# Altium PCB SiLPA_HE.PcbDoc (part 1 of 10)
Units mm, origin at the board's own origin, x right, y up, seen from the top; angles counter-clockwise.
Board outline 222.47 x 100.01 mm, 4 copper layers (Top Layer, Int1 (GND), Int2 (PWR), Bottom Layer), stack 1.508 mm thick; 661 components, 355 nets, 1925 pads, 1744 vias.
Unrouted connection lines stored in the file: 360.
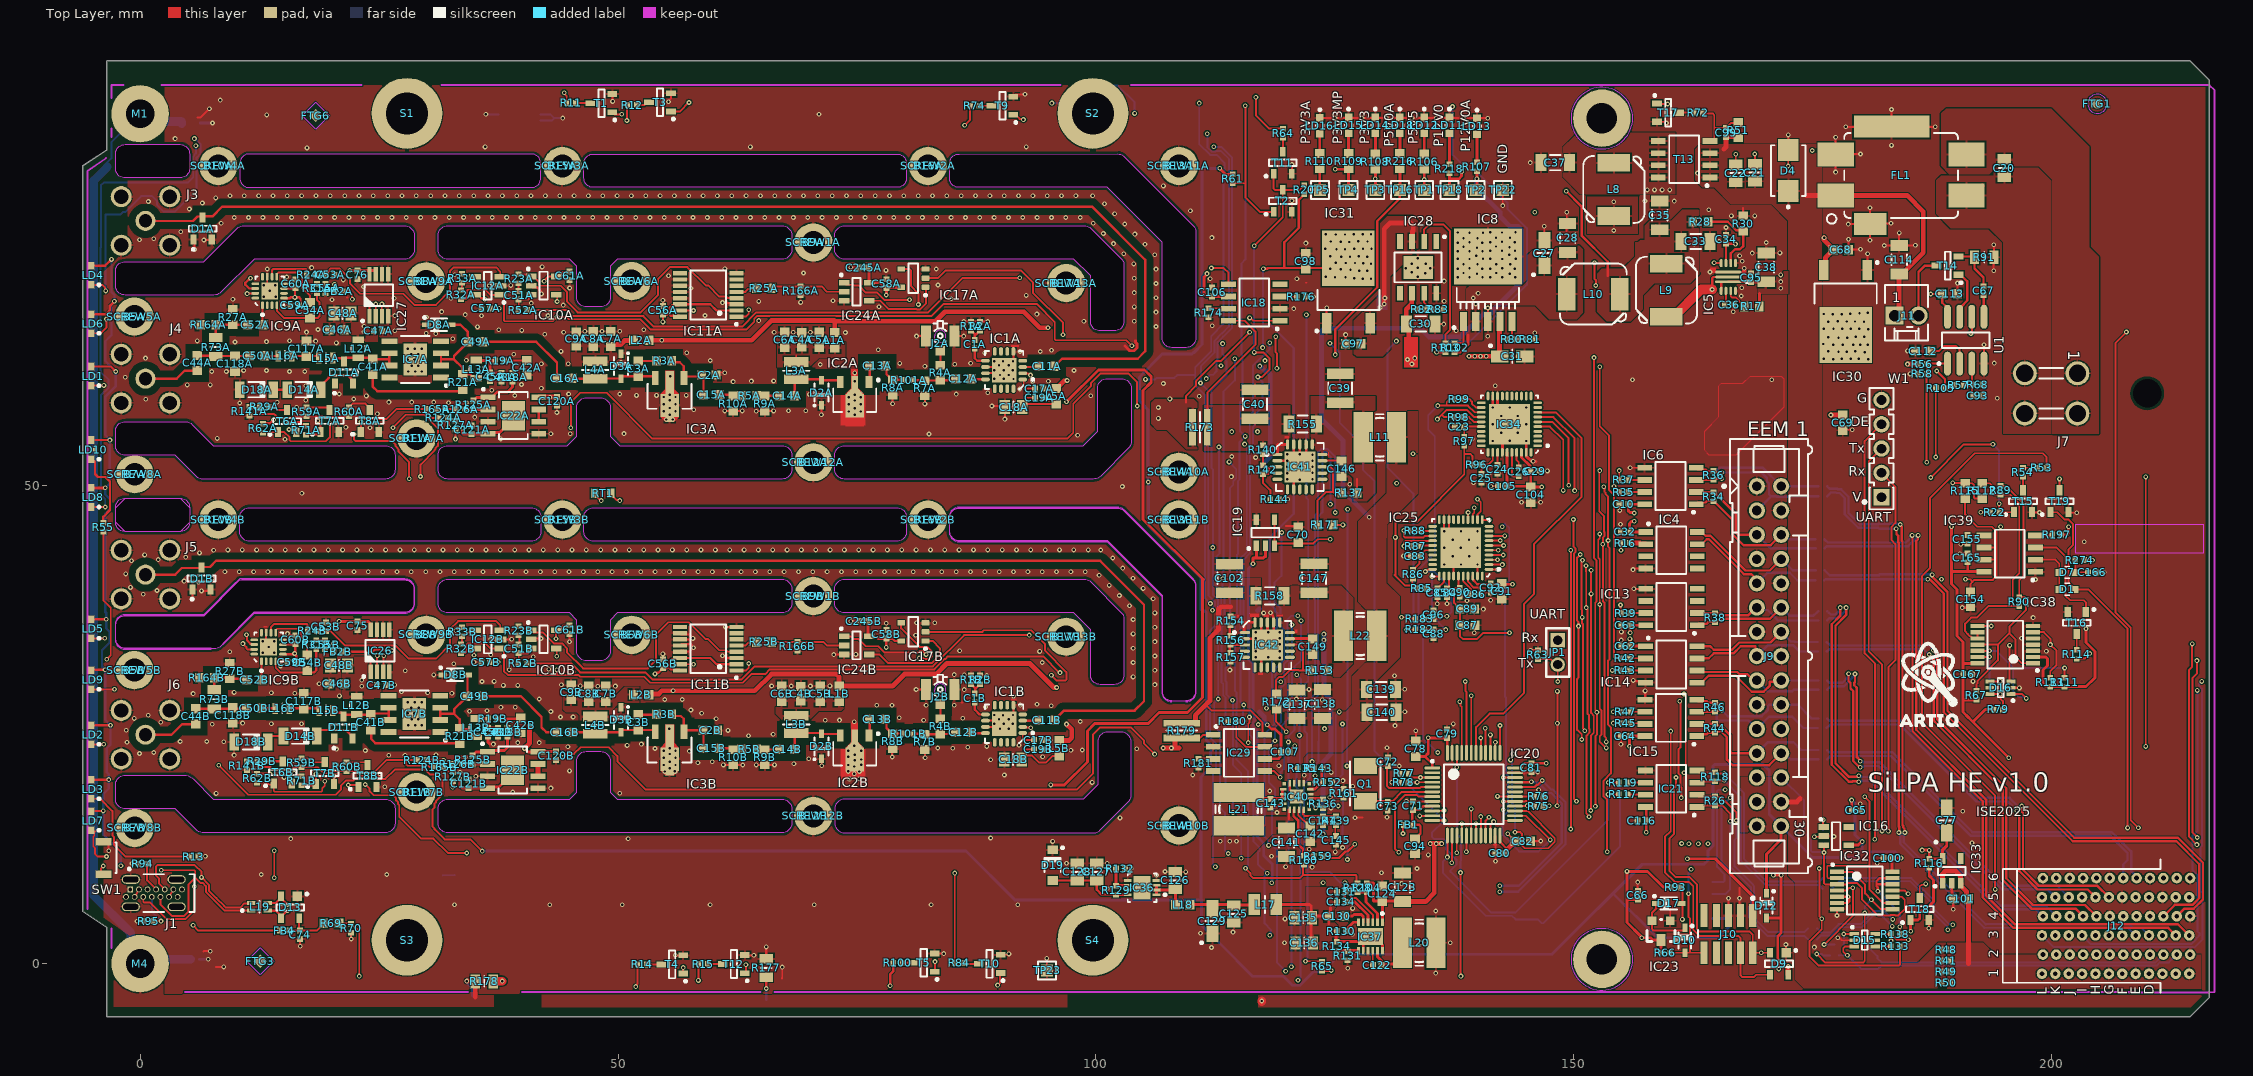
[diagram p0: Top Layer view]
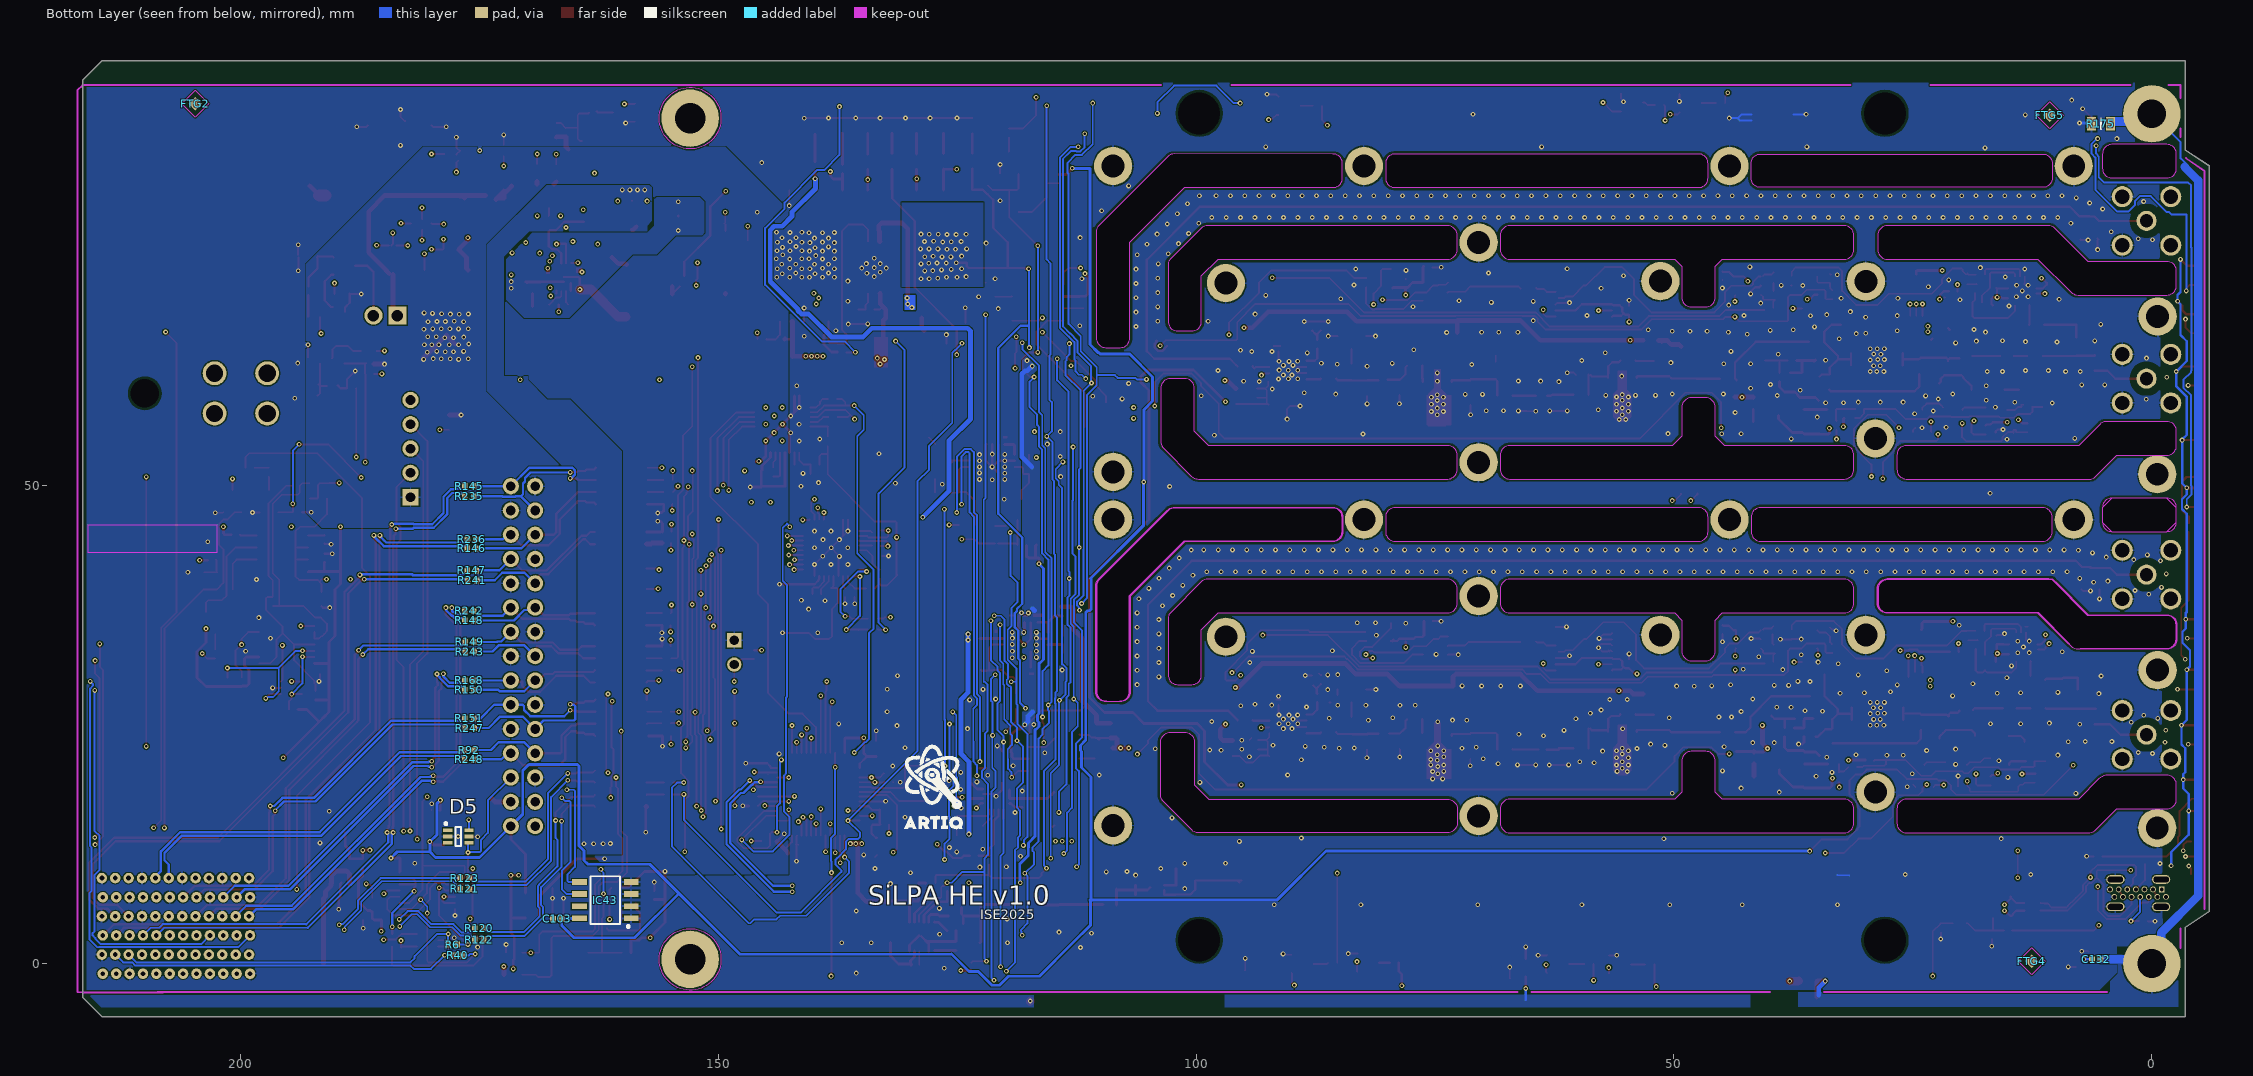
[diagram p1: Bottom Layer view, seen from below]
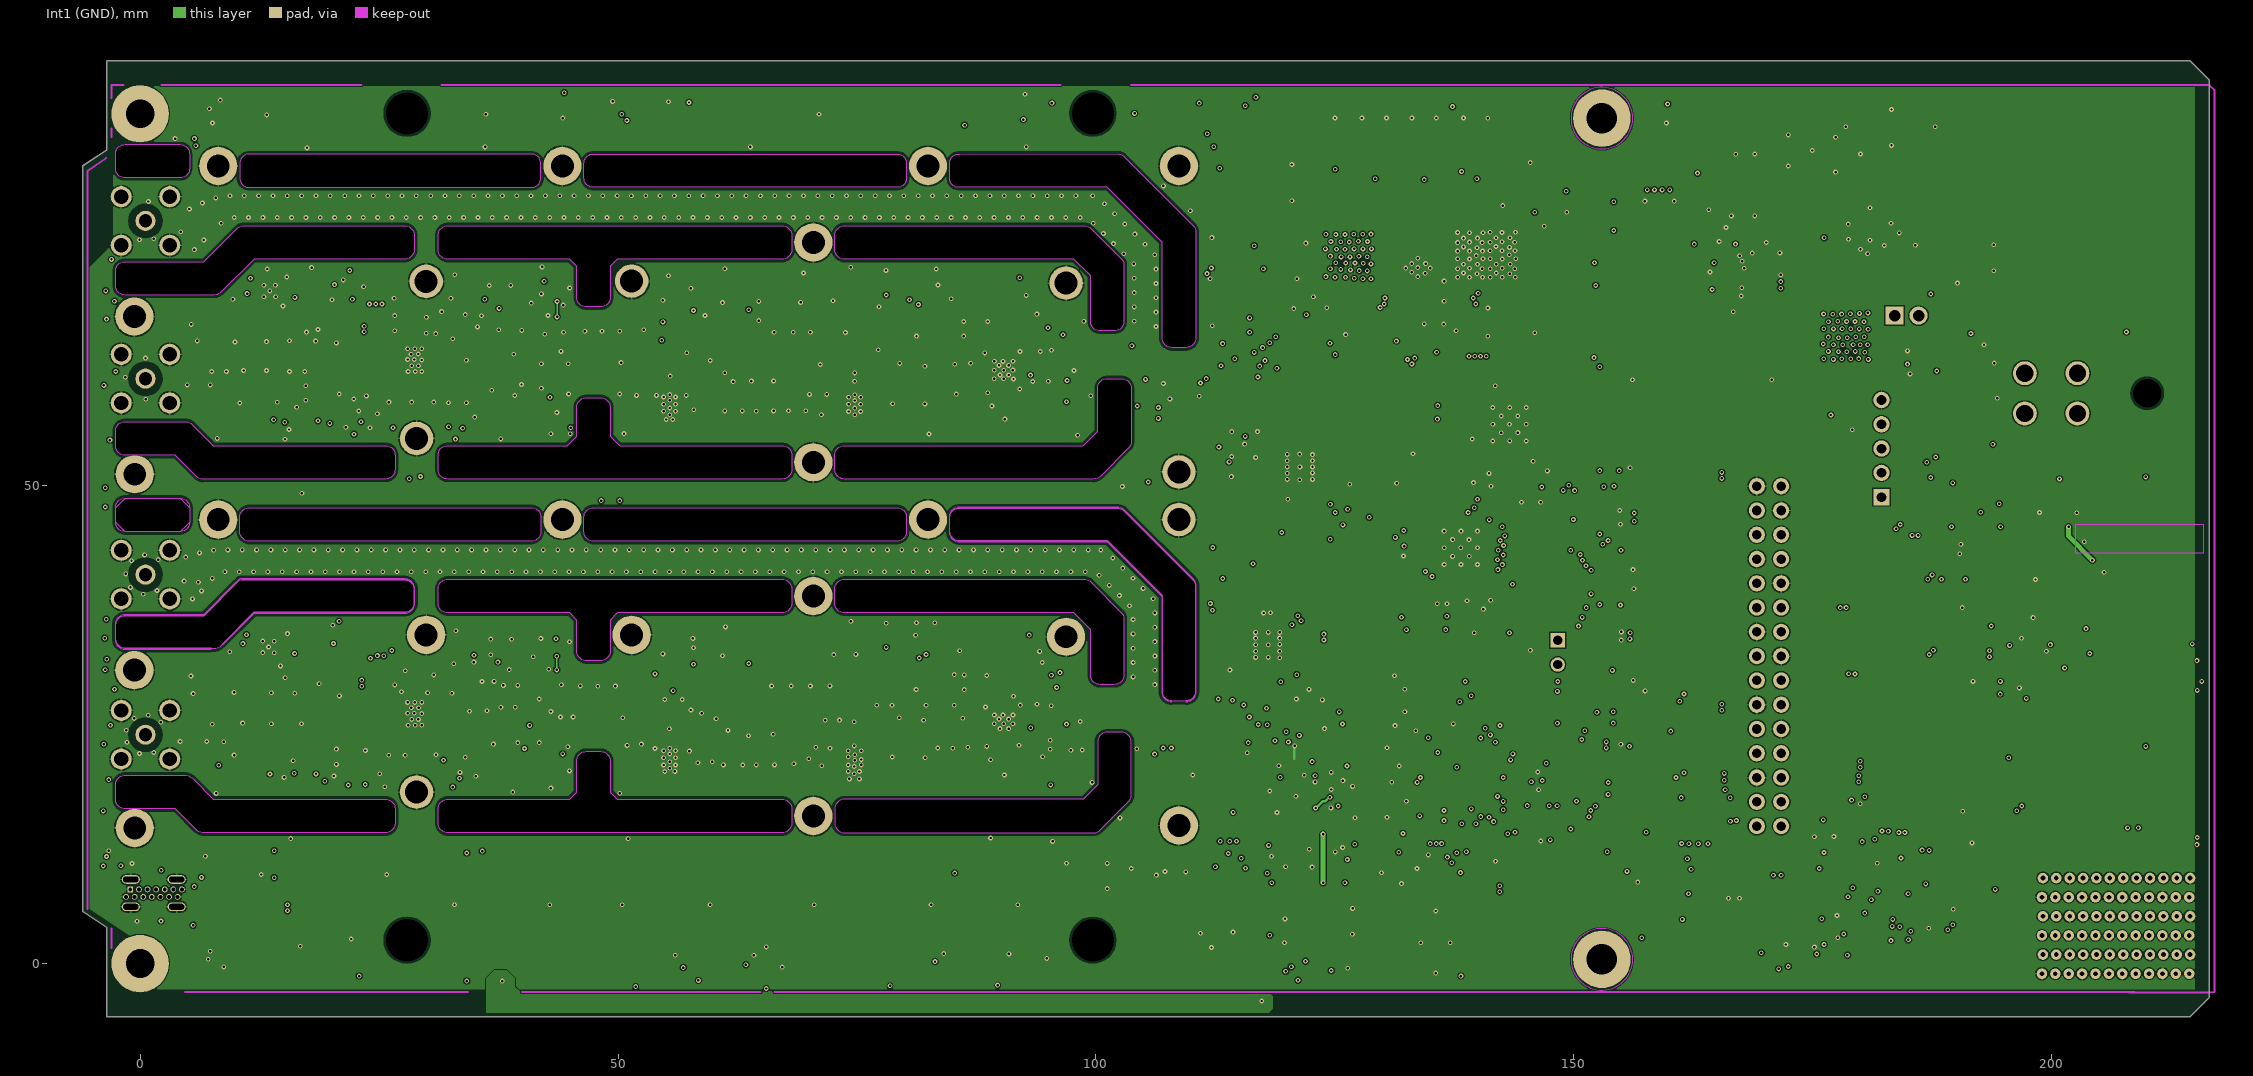
[diagram p2: Int1 (GND)]
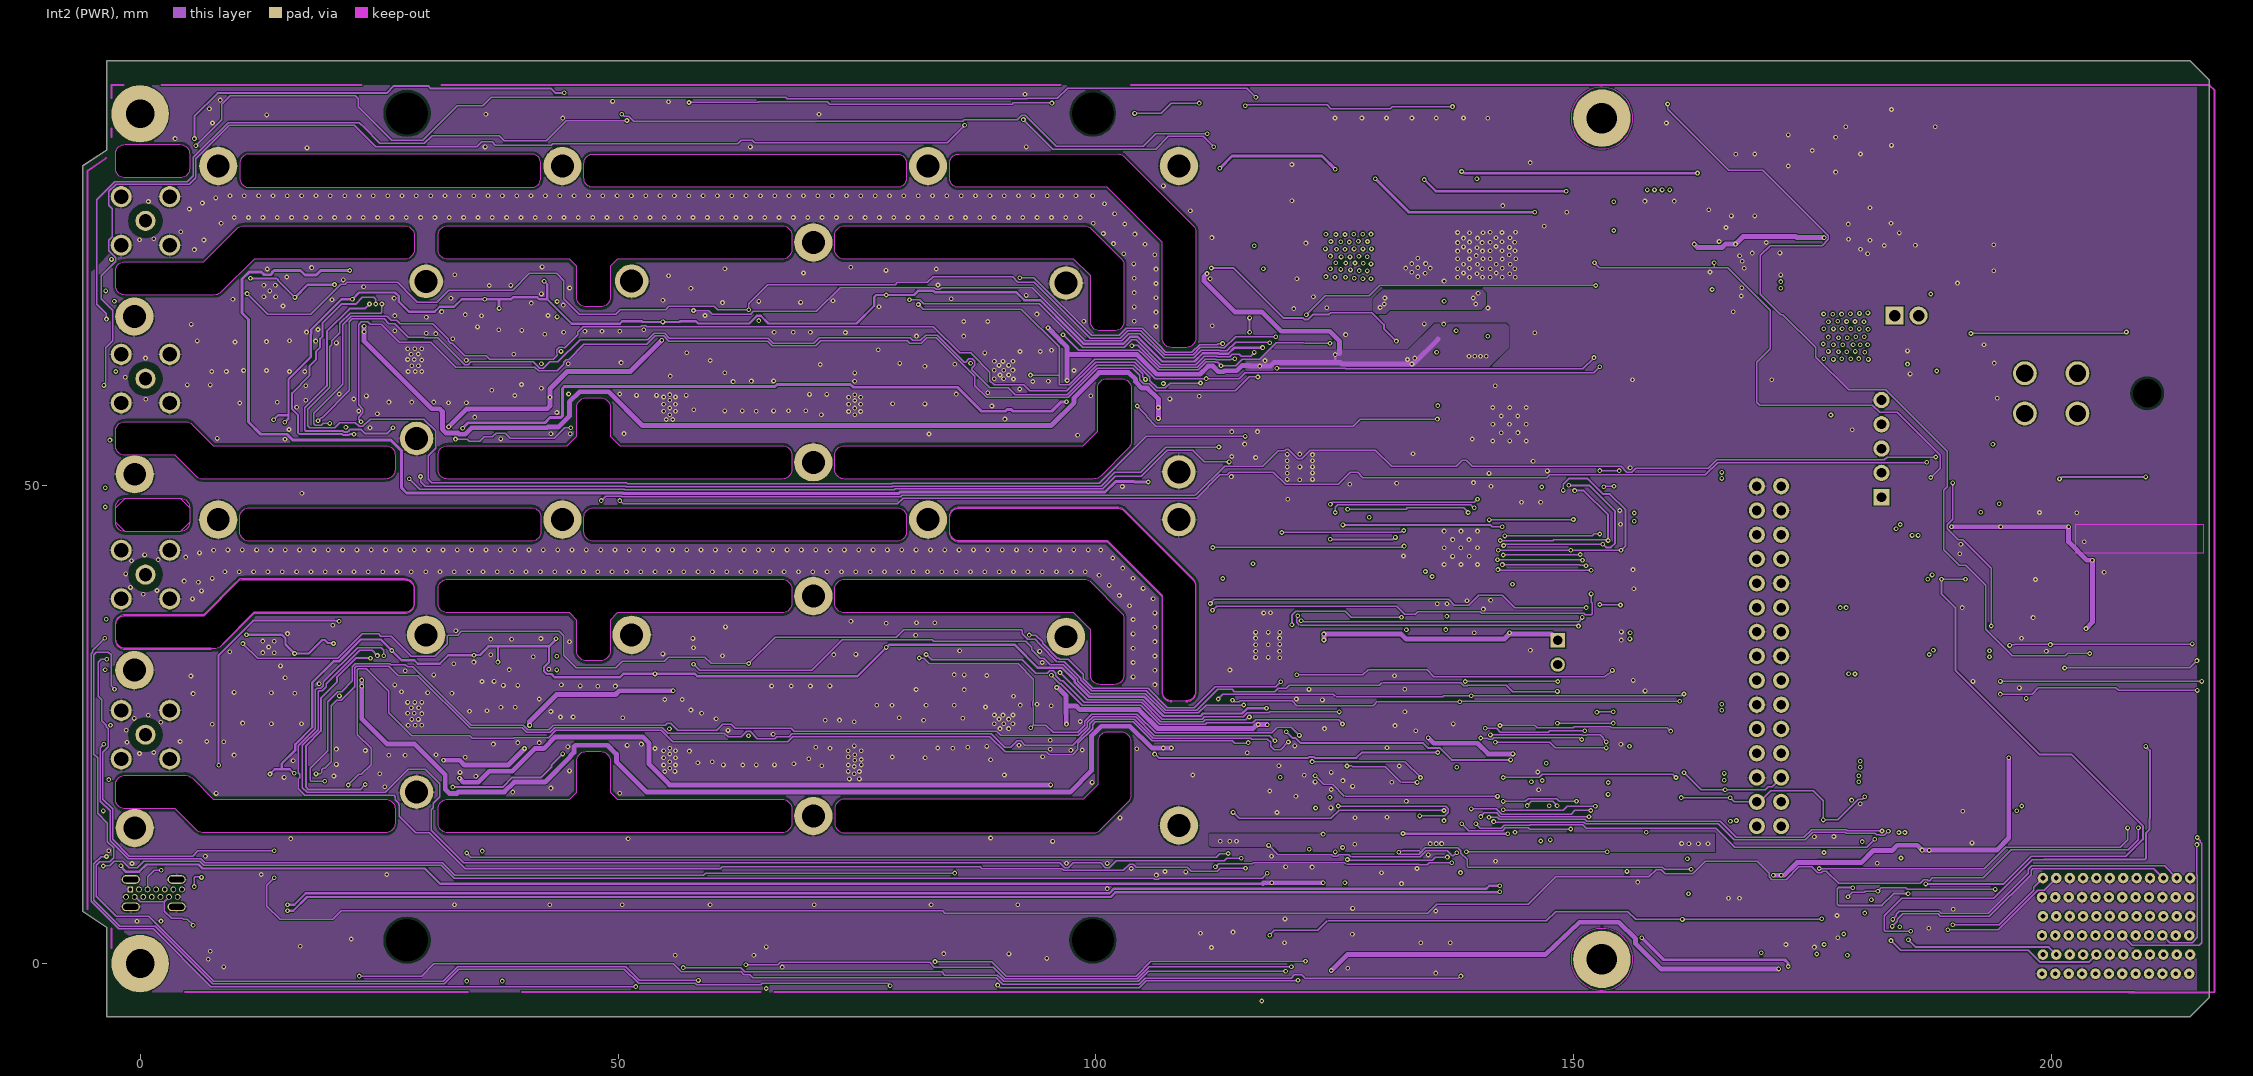
[diagram p3: Int2 (PWR)]

## Layer stack, top to bottom
Top Solder: solder mask 0.0254, SM-001, Dk 4
Top Layer: signal copper 0.018
Dielectric 1: prepreg 0.068, PP-017, Dk 4.3
Dielectric 2: prepreg 0.068, PP-017, Dk 4.3
Int1 (GND): signal copper 0.035
Dielectric 3: core 1.13, Core-039, Dk 4.6
Int2 (PWR): signal copper 0.035
Dielectric 4: prepreg 0.068, PP-017, Dk 4.3
Dielectric 5: prepreg 0.068, PP-017, Dk 4.3
Bottom Layer: signal copper 0.018
Bottom Solder: solder mask 0.0254, SM-001, Dk 4

## Board outline
-6,5.45 -6,83.45 -3.5,85.1 -3.5,94.422 -3.472,94.45 214.466,94.45 214.466,94.443 216.466,92.443 216.466,-3.557 214.466,-5.557 214.466,-5.55 -3.5,-5.55 -3.5,3.8
cut-out: 11.427,44.193 cw(c11.427,45.193) 10.427,45.193 10.427,46.693 cw(c11.427,46.693) 11.427,47.693 40.927,47.693 cw(c40.927,46.693) 41.927,46.693 41.927,45.193 cw(c40.927,45.193) 40.927,44.193
cut-out: 85.677,81.193 cw(c85.677,82.193) 84.677,82.193 84.677,83.693 cw(c85.677,83.693) 85.677,84.693 102.269,84.7 cw(c102.269,83.732) 102.953,84.417 110.201,77.169 cw(c109.64,76.609) 110.433,76.609 110.427,65.443 cw(c109.427,65.443) 109.427,64.443 107.927,64.443 cw(c107.927,65.443) 106.927,65.443 106.927,75.443 101.177,81.193
cut-out: 85.677,44.193 cw(c85.677,45.193) 84.677,45.193 84.677,46.693 cw(c85.677,46.693) 85.677,47.693 102.234,47.701 cw(c102.234,46.649) 102.963,47.406 110.164,40.205 cw(c109.47,39.536) 110.434,39.536 110.427,28.443 cw(c109.427,28.443) 109.427,27.443 107.927,27.443 cw(c107.927,28.443) 106.927,28.443 106.927,38.443 101.177,44.193
cut-out: 85.677,44.143 101.156,44.143 106.877,38.422 106.877,28.443 ccw(c107.927,28.443) 107.927,27.393 107.927,27.493 cw(c107.927,28.443) 106.977,28.443 106.977,38.443 106.963,38.479 101.213,44.229 101.177,44.243 85.677,44.243 cw(c85.677,45.193) 84.727,45.193 84.727,46.693 cw(c85.677,46.693) 85.677,47.643 102.234,47.65 cw(c102.234,46.649) 102.928,47.37 110.128,40.17 cw(c109.47,39.536) 110.383,39.536 110.377,28.443 cw(c109.427,28.443) 109.427,27.493 ccw(c109.427,27.443) 109.427,27.393 ccw(c109.427,28.443) 110.477,28.443 110.484,39.536 ccw(c109.47,39.536) 110.2,40.24 110.199,40.241 102.999,47.442 102.998,47.443 ccw(c102.234,46.649) 102.234,47.751 85.677,47.743 ccw(c85.677,46.693) 84.627,46.693 84.627,45.193 ccw(c85.677,45.193)
cut-out: 72.677,14.693 ccw(c73.677,14.693) 73.677,13.693 99.844,13.703 ccw(c99.844,14.526) 100.416,13.933 103.39,16.907 ccw(c102.633,17.637) 103.685,17.637 103.677,23.193 ccw(c102.677,23.193) 102.677,24.193 101.177,24.193 ccw(c101.177,23.193) 100.177,23.193 100.177,18.693 98.677,17.193 73.677,17.193 ccw(c73.677,16.193) 72.677,16.193
cut-out: -1.573,16.193 cw(c-1.573,17.193) -2.573,17.193 -2.573,18.693 cw(c-1.573,18.693) -1.573,19.693 4.637,19.697 cw(c4.637,18.402) 5.535,19.334 7.677,17.193 25.677,17.193 cw(c25.677,16.193) 26.677,16.193 26.677,14.693 cw(c25.677,14.693) 25.677,13.693 6.685,13.688 cw(c6.685,14.902) 5.843,14.028 3.677,16.193
cut-out: 32.177,13.693 cw(c32.177,14.693) 31.177,14.693 31.177,16.193 cw(c32.177,16.193) 32.177,17.193 44.927,17.193 45.677,17.943 45.677,21.193 cw(c46.677,21.193) 46.677,22.193 48.177,22.193 cw(c48.177,21.193) 49.177,21.193 49.177,17.943 49.927,17.193 67.177,17.193 cw(c67.177,16.193) 68.177,16.193 68.177,14.693 cw(c67.177,14.693) 67.177,13.693
cut-out: 73.677,36.693 cw(c73.677,37.693) 72.677,37.693 72.677,39.193 cw(c73.677,39.193) 73.677,40.193 98.77,40.2 cw(c98.77,39.236) 99.439,39.93 102.719,36.648 cw(c102.225,36.172) 102.911,36.172 102.927,30.193 cw(c101.927,30.193) 101.927,29.193 100.427,29.193 cw(c100.427,30.193) 99.427,30.193 99.427,34.943 97.677,36.693
cut-out: 45.677,35.943 44.927,36.693 32.177,36.693 cw(c32.177,37.693) 31.177,37.693 31.177,39.193 cw(c32.177,39.193) 32.177,40.193 67.177,40.193 cw(c67.177,39.193) 68.177,39.193 68.177,37.693 cw(c67.177,37.693) 67.177,36.693 49.927,36.693 49.177,35.943 49.177,32.693 cw(c48.177,32.693) 48.177,31.693 46.677,31.693 cw(c46.677,32.693) 45.677,32.693
cut-out: -1.573,32.943 cw(c-1.573,33.943) -2.573,33.943 -2.573,35.443 cw(c-1.573,35.443) -1.573,36.443 6.602,36.443 10.028,39.869 cw(c10.981,38.88) 10.981,40.253 27.677,40.243 27.677,40.193 cw(c27.677,39.193) 28.677,39.193 28.677,37.693 cw(c27.677,37.693) 27.677,36.693 11.927,36.693 8.439,33.206 cw(c7.77,33.9) 7.77,32.936
cut-out: 32.177,50.693 cw(c32.177,51.693) 31.177,51.693 31.177,53.193 cw(c32.177,53.193) 32.177,54.193 44.677,54.193 45.677,55.193 45.677,58.193 cw(c46.677,58.193) 46.677,59.193 48.177,59.193 cw(c48.177,58.193) 49.177,58.193 49.177,55.193 50.177,54.193 67.177,54.193 cw(c67.177,53.193) 68.177,53.193 68.177,51.693 cw(c67.177,51.693) 67.177,50.693
cut-out: 73.677,50.693 cw(c73.677,51.693) 72.677,51.693 72.677,53.193 cw(c73.677,53.193) 73.677,54.193 98.677,54.193 100.177,55.693 100.177,60.193 cw(c101.177,60.193) 101.177,61.193 102.677,61.193 cw(c102.677,60.193) 103.677,60.193 103.685,54.637 cw(c102.633,54.637) 103.39,53.907 100.475,50.992 cw(c99.715,51.78) 99.715,50.685
cut-out: 47.427,44.193 cw(c47.427,45.193) 46.427,45.193 46.427,46.693 cw(c47.427,46.693) 47.427,47.693 79.177,47.693 cw(c79.177,46.693) 80.177,46.693 80.177,45.193 cw(c79.177,45.193) 79.177,44.193
cut-out: -1.573,45.193 cw(c-1.573,46.193) -2.573,46.193 -2.573,47.693 cw(c-1.573,47.693) -1.573,48.693 4.177,48.693 cw(c4.177,47.693) 5.177,47.693 5.177,46.193 cw(c4.177,46.193) 4.177,45.193
cut-out: -1.573,53.193 cw(c-1.573,54.193) -2.573,54.193 -2.573,55.693 cw(c-1.573,55.693) -1.573,56.693 4.826,56.684 cw(c4.826,55.817) 5.428,56.441 7.677,54.193 25.677,54.193 cw(c25.677,53.193) 26.677,53.193 26.677,51.693 cw(c25.677,51.693) 25.677,50.693 6.556,50.683 cw(c6.556,51.572) 5.939,50.932 3.677,53.193
cut-out: -1.573,69.943 cw(c-1.573,70.943) -2.573,70.943 -2.573,72.443 cw(c-1.573,72.443) -1.573,73.443 6.677,73.443 10.152,76.919 cw(c10.854,76.191) 10.854,77.202 27.677,77.193 cw(c27.677,76.193) 28.677,76.193 28.677,74.693 cw(c27.677,74.693) 27.677,73.693 11.927,73.693 8.462,70.24 cw(c7.727,71.002) 7.727,69.943
cut-out: 45.677,72.943 44.927,73.693 32.177,73.693 cw(c32.177,74.693) 31.177,74.693 31.177,76.193 cw(c32.177,76.193) 32.177,77.193 67.177,77.193 cw(c67.177,76.193) 68.177,76.193 68.177,74.693 cw(c67.177,74.693) 67.177,73.693 49.927,73.693 49.177,72.943 49.177,69.693 cw(c48.177,69.693) 48.177,68.693 46.677,68.693 cw(c46.677,69.693) 45.677,69.693
cut-out: 73.677,73.693 cw(c73.677,74.693) 72.677,74.693 72.677,76.193 cw(c73.677,76.193) 73.677,77.193 98.767,77.201 cw(c98.767,76.229) 99.454,76.917 102.755,73.609 cw(c102.339,73.193) 102.927,73.193 102.927,67.193 cw(c101.927,67.193) 101.927,66.193 100.427,66.193 cw(c100.427,67.193) 99.427,67.193 99.427,71.943 97.677,73.693
cut-out: 46.427,82.193 46.427,83.693 cw(c47.427,83.693) 47.427,84.693 79.177,84.693 cw(c79.177,83.693) 80.177,83.693 80.177,82.193 cw(c79.177,82.193) 79.177,81.193 47.427,81.193 cw(c47.427,82.193)
cut-out: 11.427,81.193 40.927,81.193 ccw(c40.927,82.193) 41.927,82.193 41.927,83.693 ccw(c40.927,83.693) 40.927,84.693 11.427,84.693 ccw(c11.427,83.693) 10.427,83.693 10.427,82.193 ccw(c11.427,82.193)
cut-out: -1.573,82.193 cw(c-1.573,83.193) -2.573,83.193 -2.573,84.693 cw(c-1.573,84.693) -1.573,85.693 4.177,85.693 cw(c4.177,84.693) 5.177,84.693 5.177,83.193 cw(c4.177,83.193) 4.177,82.193
cut-out: -1.573,32.993 cw(c-1.573,33.943) -2.523,33.943 -2.523,35.443 cw(c-1.573,35.443) -1.573,36.393 6.677,36.393 6.713,36.407 10.448,40.143 27.677,40.143 cw(c27.677,39.193) 28.627,39.193 28.627,37.693 cw(c27.677,37.693) 27.677,36.743 11.927,36.743 11.891,36.729 8.641,33.479 ccw(c8.677,33.443) 8.713,33.407 11.948,36.643 27.677,36.643 ccw(c27.677,37.693) 28.727,37.693 28.727,39.193 ccw(c27.677,39.193) 27.677,40.243 10.427,40.243 10.391,40.229 6.656,36.493 -1.573,36.493 ccw(c-1.573,35.443) -2.623,35.443 -2.623,33.943 ccw(c-1.573,33.943) -1.573,32.893 7.427,32.893 7.427,32.993
cut-out: -1.573,48.693 4.177,48.693 5.177,47.693 5.177,46.193 4.177,45.193 -1.573,45.193 -2.573,46.193 -2.573,47.693

## Design rules (kind name [scope] priority, off if disabled: settings)
AcuteAngle [All] p1: minimum=6.00000000000000E+0001 checktracksonly=FALSE
AssemblyTestPointUsage [All] p1 off:
AssemblyTestpoint [All] p1 off: testpointundercomponent=TRUE minsize=1.016 maxsize=2.54 preferedsize=1.524 minholesize=0 maxholesize=1.016 preferedholesize=0.813 testpointgrid=0.025 usegrid=TRUE gridtolerance=0 allowsidetop=TRUE allowsidebottom=TRUE
BoardOutlineClearance [All] p1: gap=0.4 ignorepadtopadclearanceinfootprint=FALSE except(0: THPad-OutlineEdge THPad-CutoutEdge; 0.3: Arc-CutoutEdge Track-CutoutEdge SMDPad-CutoutEdge Via-CutoutEdge Fill-CutoutEdge Poly-CutoutEdge Region-CutoutEdge Text-CutoutEdge)
Clearance Clearance_50Ohm [InNetClass('50Ohm') or InNetClass('50_Ohms')] p1: gap=0.5 ignorepadtopadclearanceinfootprint=TRUE except(0: THPad-Hole; 0.1: Arc-Text Track-Text SMDPad-Text THPad-Text Via-Text Fill-Text Poly-Text Region-Text Text-Text; 0.2: Arc-Arc Arc-Track Arc-SMDPad Arc-THPad Arc-Via Track-Track Track-SMDPad Track-THPad Track-Via SMDPad-SMDPad SMDPad-THPad SMDPad-Via THPad-THPad THPad-Via Via-Via; 0.25: Arc-Hole Track-Hole SMDPad-Hole Via-Hole Fill-Hole Poly-Hole Region-Hole Text-Hole; 0.75: Arc-Poly Track-Poly SMDPad-Poly THPad-Poly Via-Poly Fill-Poly Poly-Poly)
Clearance Clearance_LEDkeepout [OnLayer('Keep-Out Layer') vs (HasFootprint('LED_AVAGO_HSMC-C120') OR HasFootprint('LED_AVAGO_HSME-C120'))] p2: gap=0.125 ignorepadtopadclearanceinfootprint=TRUE except(0: Arc-SMDPad Track-SMDPad THPad-Hole; 0.1: Arc-Text Track-Text SMDPad-Text THPad-Text Via-Text Fill-Text Poly-Text Region-Text Text-Text; 0.25: Arc-Hole Track-Hole SMDPad-Hole Via-Hole Fill-Hole Poly-Hole Region-Hole Text-Hole)
Clearance [All] p3: gap=0.125 ignorepadtopadclearanceinfootprint=TRUE except(0: THPad-Region THPad-Hole; 0.1: Arc-Text Track-Text SMDPad-Text THPad-Text Via-Text Fill-Text Poly-Text Region-Text Text-Text; 0.25: Arc-Hole Track-Hole SMDPad-Hole Via-Hole Fill-Hole Poly-Hole Region-Hole Text-Hole)
Clearance Clearance_poly_balancing [InNamedPolygon('gatga') or InNamedPolygon('BAL_BOT') or InNamedPolygon('ML1_BAL') or  InNamedPolygon('ML2_BAL')] p4: gap=0.15 ignorepadtopadclearanceinfootprint=TRUE
ComponentClearance ComponentClearance_screws [HasFootprint('DELOCK_65848')] p1: gap=-1 collisioncheckmode=3 verticalgap=-1 showdistances=FALSE
ComponentClearance ComponentClearance_screws_1 [HasFootprint('MTG240_400')] p2: gap=-1 collisioncheckmode=3 verticalgap=-1 showdistances=FALSE
ComponentClearance ComponentClearance_screws_2 [HasFootprint('MTG300_600')] p3: gap=-1 collisioncheckmode=3 verticalgap=-1 showdistances=FALSE
ComponentClearance [All] p4: gap=0.1 collisioncheckmode=3 verticalgap=0.1 showdistances=FALSE
DiffPairsRouting DiffPairsRouting_100_Ohm [InDifferentialPairClass('Diff_100Ohm')] p1: maxlimit=0.127 minlimit=0.127 mostfreqgap=0.127 toplayer_minwidth=0.152 toplayer_maxwidth=0.152 toplayer_prefwidth=0.152 midlayer1_minwidth=0.087 midlayer1_maxwidth=0.087 midlayer1_prefwidth=0.087 midlayer2_minwidth=0.381 midlayer2_maxwidth=0.381 midlayer2_prefwidth=0.381 bottomlayer_minwidth=0.152 bottomlayer_maxwidth=0.152 bottomlayer_prefwidth=0.152 maxuncoupledlength=11.1
DiffPairsRouting DiffPairsRouting_90_Ohm [InDifferentialPairClass('Diff_90Ohm')] p2: maxlimit=0.127 minlimit=0.127 mostfreqgap=0.127 toplayer_minwidth=0.152 toplayer_maxwidth=0.152 toplayer_prefwidth=0.152 midlayer1_minwidth=0.087 midlayer1_maxwidth=0.087 midlayer1_prefwidth=0.087 midlayer2_minwidth=0.381 midlayer2_maxwidth=0.381 midlayer2_prefwidth=0.381 bottomlayer_minwidth=0.152 bottomlayer_maxwidth=0.152 bottomlayer_prefwidth=0.152 maxuncoupledlength=12.7
DiffPairsRouting DiffPairsRouting_lvpecl [InDifferentialPairClass('LVPECL')] p3: maxlimit=0.31 minlimit=0.125 mostfreqgap=0.31 toplayer_maxgap=0.125 toplayer_prefgap=0.125 toplayer_minwidth=0.095 toplayer_maxwidth=0.095 toplayer_prefwidth=0.095 midlayer1_mingap=0.25 midlayer1_maxgap=0.25 midlayer1_prefgap=0.25 midlayer1_minwidth=0.15 midlayer1_maxwidth=0.15 midlayer1_prefwidth=0.15 midlayer2_mingap=0.31 midlayer2_minwidth=0.165 midlayer2_maxwidth=0.165 midlayer2_prefwidth=0.165 bottomlayer_maxgap=0.125 bottomlayer_prefgap=0.125 bottomlayer_minwidth=0.095 bottomlayer_maxwidth=0.095 bottomlayer_prefwidth=0.095 maxuncoupledlength=3
FabricationTestPointUsage TestPointUsage [All] p1: valid=0 allowmultiple=FALSE
FabricationTestpoint Testpoint [All] p1: side=3 testpointundercomponent=TRUE minsize=1.016 maxsize=2.54 preferedsize=1.524 minholesize=0.508 maxholesize=1.016 preferedholesize=0.813 testpointgrid=0.025 allowsidetop=TRUE allowsidebottom=TRUE usegrid=TRUE gridtolerance=0
Height Height_1 [OnLayer('BottomLayer')] p2: minheight=0 maxheight=2 prefheight=1
HoleSize [All] p1: absolutevalues=TRUE maxlimit=5 minlimit=0.15 maxpercent=80.000 minpercent=20.000
HoleToHoleClearance [All] p1: gap=0.15 allowstackedmicrovias=TRUE
MatchedLengths MatchedLengths_EEM0 [InNetClass('EEM0')] p1: tolerance=50 checknetsindiffpair=FALSE checkdiffpairvsdiffpair=TRUE checkxsignals=TRUE checkothers=TRUE
MatchedLengths MatchedLengths_EEM1 [InNetClass('EEM1')] p2: tolerance=50 checknetsindiffpair=FALSE checkdiffpairvsdiffpair=TRUE checkxsignals=TRUE checkothers=TRUE
MatchedLengths [InDifferentialPairClass('All Differential Pairs')] p3: tolerance=5 checknetsindiffpair=TRUE checkdiffpairvsdiffpair=FALSE checkxsignals=FALSE checkothers=FALSE
MinimumAnnularRing MinimumAnnularRing_outer [OnLayer('TopLayer') or OnLayer('BottomLayer')] p1: minimumring=0.05
MinimumAnnularRing MinimumAnnularRing_mid [OnLayer('MidLayer1') or OnLayer('MidLayer2') or OnLayer('MidLayer3') or OnLayer('MidLayer4')] p2: minimumring=0.15
MinimumSolderMaskSliver [All] p1: minsoldermaskwidth=0.15
ParallelSegment [All] p1 off: limit=5 gap=0.254
PlaneClearance [All] p1: clearance=0.2
PlaneConnect [All] p1: pad.planeconnectstyle=Relief pad.reliefexpansion=0.2 pad.reliefentries=4 pad.reliefconductorwidth=0.254 pad.reliefairgap=0.15 via.planeconnectstyle=Direct via.reliefexpansion=0.2 via.reliefentries=4 via.reliefconductorwidth=0.254 via.reliefairgap=0.15
PolygonConnect [All] p1: thpad.connectstyle=Relief thpad.reliefconductorwidth=0.2 thpad.reliefentries=4 thpad.polygonreliefangle="90 Angle" thpad.airgapwidth=0.15 smdpad.connectstyle=Relief smdpad.reliefconductorwidth=0.254 smdpad.reliefentries=4 smdpad.polygonreliefangle="90 Angle" smdpad.airgapwidth=0.15 via.connectstyle=Direct via.reliefconductorwidth=0.254 via.reliefentries=4 via.polygonreliefangle="45 Angle" via.airgapwidth=0.254
RoomDefinition SiLPA_HE_EEM_Connectors [InComponentClass('SiLPA_HE_EEM_Connectors')] p1: confinementstyle=ConfineIn formatcopy=TRUE lockcomponents=FALSE outline -53.473,-101.657 -2.673,-101.657 -2.673,-76.257 -53.473,-76.257
RoomDefinition SiLPA_HE [InComponentClass('SiLPA_HE')] p2: confinementstyle=ConfineIn formatcopy=TRUE lockcomponents=FALSE outline -53.473,-101.657 -2.673,-101.657 -2.673,-76.257 -53.473,-76.257
RoomDefinition CPCIS_Connectors_P1_P6 [InComponentClass('CPCIS_Connectors_P1_P6')] p3 off: confinementstyle=ConfineIn formatcopy=TRUE lockcomponents=FALSE outline 180.197,1.573 216.427,1.573 216.427,48.543 180.197,48.543
RoomDefinition U_SiLPA_RF_detector1 [InComponentClass('U_SiLPA_RF_detector1')] p4 off: confinementstyle=ConfineIn formatcopy=TRUE lockcomponents=FALSE outline 4.177,28.943 100.98,28.943 100.98,36.693 4.177,36.693
RoomDefinition U_SiLPA_RF_detector0 [InComponentClass('U_SiLPA_RF_detector0')] p5 off: confinementstyle=ConfineIn formatcopy=TRUE lockcomponents=FALSE outline 4.177,65.943 100.98,65.943 100.98,73.693 4.177,73.693
RoomDefinition U_SiLPA_RF_channel_preamp1 [InComponentClass('U_SiLPA_RF_channel_preamp1')] p6 off: confinementstyle=ConfineIn formatcopy=TRUE lockcomponents=FALSE outline 45.427,32.873 101.427,32.873 101.427,17.193 45.427,17.193
RoomDefinition U_SiLPA_RF_channel0 [InComponentClass('U_SiLPA_RF_channel0')] p7 off: selectionmemoryflags=3 confinementstyle=ConfineIn formatcopy=TRUE lockcomponents=FALSE outline 45.427,69.938 4.177,69.938 4.177,54.193 45.427,54.193
RoomDefinition U_SiLPA_PWR_Supply [InComponentClass('U_SiLPA_PWR_Supply')] p8 off: confinementstyle=ConfineIn formatcopy=TRUE lockcomponents=FALSE outline 109.624,-5.024 133.328,-5.024 133.328,42.811 109.624,42.811
RoomDefinition U_SiLPA_MCU [InComponentClass('U_SiLPA_MCU')] p9 off: confinementstyle=ConfineIn formatcopy=TRUE lockcomponents=FALSE outline 113.199,90.455 165.083,90.455 165.083,44.874 113.199,44.874
RoomDefinition U_SiLPA_RF_channel1 [InComponentClass('U_SiLPA_RF_channel1')] p10 off: confinementstyle=ConfineIn formatcopy=TRUE lockcomponents=FALSE outline 45.427,32.938 4.177,32.938 4.177,17.193 45.427,17.193
RoomDefinition U_SiLPA_RF_channel_preamp0 [InComponentClass('U_SiLPA_RF_channel_preamp0')] p11 off: confinementstyle=ConfineIn formatcopy=TRUE lockcomponents=FALSE outline 45.427,69.873 101.427,69.873 101.427,54.193 45.427,54.193
RoutingLayers RoutingLayers_1 [InNetClass('Diff_100Ohm')] p1 off: top layer_v5=TRUE mid layer 1_v5=FALSE mid layer 2_v5=TRUE bottom layer_v5=TRUE
RoutingLayers [All] p2: top layer_v5=TRUE mid layer 1_v5=TRUE mid layer 2_v5=TRUE bottom layer_v5=TRUE
RoutingTopology RoutingTopology_DDRAddressAndControls [InNetClass('DDR_AddressAndControls')] p1: topology=Daisy_Simple
RoutingTopology [All] p2: topology=Shortest
RoutingVias [InNetClass('PWR')] p1: holewidth=0.15 width=0.35 viastyle="Through Hole" minholewidth=0.15 minwidth=0.35 maxholewidth=0.6 maxwidth=0.8 useviatemplates=TRUE viatemplateguid#1={0BC00CCE-F73D-4F9E-A1CC-6DFA95FBE919} viatemplateguid#2={7A3E28A6-8413-49D5-8DCB-1CC718B38F6D} viatemplateguid#3={0B550E6D-E270-4B03-94D4-8FA941DF072C} viatemplateguid#4={9B634C7D-CF1E-4D0B-AE4C-DA72A60F2F6C} viatemplatename#1=v50h25m0 viatemplatename#2=v50h25m0mx0 viatemplatename#3=v50h25m0mx0(1) viatemplatename#4=v50h25m0mx0(2)
RoutingVias RoutingVias_1 [All] p2: holewidth=0.711 width=1.27 viastyle="Through Hole" minholewidth=0.711 minwidth=1.27 maxholewidth=0.711 maxwidth=1.27 useviatemplates=TRUE viatemplateguid#1={0BC00CCE-F73D-4F9E-A1CC-6DFA95FBE919} viatemplateguid#2={7A3E28A6-8413-49D5-8DCB-1CC718B38F6D} viatemplateguid#3={0B550E6D-E270-4B03-94D4-8FA941DF072C} viatemplateguid#4={9B634C7D-CF1E-4D0B-AE4C-DA72A60F2F6C} viatemplatename#1=v50h25m0 viatemplatename#2=v50h25m0mx0 viatemplatename#3=v50h25m0mx0(1) viatemplatename#4=v50h25m0mx0(2)
SMDEntry [All] p1 off: side=TRUE corner=TRUE anyangle=FALSE
SilkToSilkClearance [All] p1: silktosilkclearance=0.15
SilkToSolderMaskClearance SilkscreenOverComponentPads [IsPad] p1: minsilkscreentomaskgap=0.15 clearancetoexposedcopper=FALSE
SolderMaskExpansion [All] p1: expansion=0.05 istentingtop=FALSE
StubLength [All] p1: limit=3
SupplyNets "Schematic Supply Nets_21" [InNet('P25V0_0')] p1: voltage=0.000
SupplyNets "Schematic Supply Nets_9" [InNet('P12V0_DIOT')] p2: voltage=0.000
SupplyNets "Schematic Supply Nets_3" [InNet('P3V3_DIOT')] p3: voltage=0.000
SupplyNets "Schematic Supply Nets_13" [InNet('N5V0')] p4: voltage=0.000
SupplyNets "Schematic Supply Nets_20" [InNet('P25V0_1')] p5: voltage=0.000
SupplyNets "Schematic Supply Nets_19" [InNet('P26V0_SW')] p6: voltage=0.000
SupplyNets "Schematic Supply Nets_18" [InNet('P12V0')] p7: voltage=0.000
SupplyNets "Schematic Supply Nets_17" [InNet('P2V5REF')] p8: voltage=0.000
SupplyNets "Schematic Supply Nets_16" [InNet('GND')] p9: voltage=0.000
SupplyNets "Schematic Supply Nets_15" [InNet('P5V5A')] p10: voltage=0.000
SupplyNets "Schematic Supply Nets_14" [InNet('P3V3_MP')] p11: voltage=0.000
SupplyNets "Schematic Supply Nets_12" [InNet('P5V0A')] p12: voltage=0.000
SupplyNets "Schematic Supply Nets_11" [InNet('P12V0F')] p13: voltage=0.000
SupplyNets "Schematic Supply Nets_10" [InNet('N5V0A')] p14: voltage=0.000
SupplyNets "Schematic Supply Nets_8" [InNet('P3V3')] p15: voltage=0.000
SupplyNets "Schematic Supply Nets_7" [InNet('P5V5')] p16: voltage=0.000
SupplyNets "Schematic Supply Nets_6" [InNet('P3V3REF')] p17: voltage=0.000
SupplyNets "Schematic Supply Nets_5" [InNet('P3V3A')] p18: voltage=0.000
SupplyNets "Schematic Supply Nets_4" [InNet('N6V0')] p19: voltage=0.000
SupplyNets "Schematic Supply Nets_2" [InNet('STRIP1')] p20: voltage=0.000
SupplyNets "Schematic Supply Nets_1" [InNet('P12V0_SW')] p21: voltage=0.000
UnConnectedPin [All] p1 off:
ViasUnderSMD ViasUnderSMD_1 [( InNet('GND') AND ((InComponent('IC1') or InComponent('IC29') or InComponent('IC2A') or InComponent('IC2B') or InComponent('IC3A') or InComponent('IC3B') or InComponent('IC14') or InComponent('IC15') or InComponent('IC18')) ) or InComponent('IC30') or InComponent('IC31')   )] p1: allowed=TRUE
ViasUnderSMD [All] p2: allowed=FALSE
Width Width_Power [InNet('P3V3') or InNet('P3V3A') Or InNet('P3V3REF') Or InNet('P3V3_MP') Or InNet('P5V0') Or InNet('P5V0A') Or InNet('P5V5') Or InNet('P6V5') Or InNet('P6V5A') Or InNet('P12V0') Or InNet('P12V0A') Or InNet('P12V0_EEM') Or InNet('P12VA') Or InNet('NetC39A_2') Or InNet('NetC20_1') Or InNet('NetC20_2') Or InNet('NetC38_2') Or InNet('NetIC4_2') Or InNet('NetC24_2')] p1: maxlimit=2.5 minlimit=0.15 preferedwidth=0.5
Width Width_50Ohm [InNetClass('50Ohm') or InNetClass('50_Ohms')] p2: maxlimit=0.643 minlimit=0.245 preferedwidth=0.643 toplayer_maxwidth=0.245 toplayer_prefwidth=0.245 bottomlayer_maxwidth=0.245 bottomlayer_prefwidth=0.245 impedanceprofiledriven=TRUE impedanceprofileid={8791CE52-A5B6-4AB0-A527-1D41D4AC5D75} impedanceprofilevalue=50.000000 minimp=50.000000 maximp=50.000000 favimp=50.000000
Width [All] p3: maxlimit=2 minlimit=0.125 preferedwidth=0.2
15 further rules are at their usual default settings.

## Classes and differential pairs
component class U_SiLPA_PA_Supply: C39 C40 C102 C106 C107 C122 C123 C124 C125 C126 C127 C128 C129 C130 C131 C134 C135 C136 C137 C138 C139 C140 C141 C142 C143 C144 C145 C146 C147 C149 D19 IC18 IC29 IC36 IC37 IC40 IC41 IC42 L11 L17 L18 L20 L21 L22 R104 R128 R129 R130 R131 R132 R134 R135 R136 R137 R139 R140 R142 R143 R144 R152 R153 R154 R155 R156 R157 R158 R159 R160 R161 R171 R172 R173 R174 R176 R179 R180 R181
channel class SiLPA_HE_RF_detector: U_SiLPA_RF_detector0 U_SiLPA_RF_detector1
channel class SiLPA_HE_RF_channel_preamp: U_SiLPA_RF_channel_preamp0 U_SiLPA_RF_channel_preamp1
channel class SiLPA_HE_RF_channel: U_SiLPA_RF_channel0 U_SiLPA_RF_channel1
net class ESD_STRIP: STRIP1 STRIP2 STRIP3
net class PWR: NetC20_2 NetC40_2 NetC102_2 P3V3 P3V3A P5V0A P5V5 P5V5A P12V0 P12V0_DIOT P12V0_SW P12V0F
net class BP_IO.LVDS_P[0..9]: BP_IO.LVDS_P0 BP_IO.LVDS_P1 BP_IO.LVDS_P2 BP_IO.LVDS_P3 BP_IO.LVDS_P4 BP_IO.LVDS_P5 BP_IO.LVDS_P6 BP_IO.LVDS_P7 BP_IO.LVDS_P8 BP_IO.LVDS_P9
net class BP_IO.LVDS_N[0..9]: BP_IO.LVDS_N0 BP_IO.LVDS_N1 BP_IO.LVDS_N2 BP_IO.LVDS_N3 BP_IO.LVDS_N4 BP_IO.LVDS_N5 BP_IO.LVDS_N6 BP_IO.LVDS_N7 BP_IO.LVDS_N8 BP_IO.LVDS_N9
component class Overlapping: J12
component class CPCIS_Connectors_P1_P6: C154 C155 C165 C166 C167 D1 D7 D15 D16 IC38 IC39 J12 R53 R54 R65 R67 R79 R89 R90 R111 R112 R113 R114 R115 R116 R133 R138 R197 R274 T15 T16 T18 T19
net class 50_Ohm: NetC16A_2 NetC16B_2 NetC41A_2 NetC41B_2 NetJ2A_1 NetJ2B_1
component class U_SiLPA_RF_detector1: C51B C52B C53B C54B C55B C56B C57B C58B C59B C60B C61B C245B FB2B IC9B IC10B IC11B IC12B IC17B IC24B R23B R24B R25B R27B R31B R32B R33B R52B R166B
component class U_SiLPA_RF_detector0: C51A C52A C53A C54A C55A C56A C57A C58A C59A C60A C61A C245A FB2A IC9A IC10A IC11A IC12A IC17A IC24A R23A R24A R25A R27A R31A R32A R33A R52A R166A
component class U_SiLPA_RF_channel_preamp1: C1B C2B C3B C4B C5B C6B C7B C8B C9B C11B C12B C13B C14B C15B C16B C17B C18B C19B D1B D2B D3B IC1B IC2B IC3B J2B L1B L2B L3B L4B L5B R1B R2B R3B R4B R5B R7B R8B R9B R10B R101B
component class U_SiLPA_RF_channel_preamp0: C1A C2A C3A C4A C5A C6A C7A C8A C9A C11A C12A C13A C14A C15A C16A C17A C18A C19A D1A D2A D3A IC1A IC2A IC3A J2A L1A L2A L3A L4A L5A R1A R2A R3A R4A R5A R7A R8A R9A R10A R101A
component class U_SiLPA_RF_channel1: B5B B6B B7B B8B B9B B10B B11B B12B B13B B14B B15B B16B B17B C41B C42B C43B C44B C45B C46B C47B C48B C49B C50B C117B C118B C120B C121B D8B D11B D14B D18B IC7B IC22B L12B L13B L15B L16B R18B R19B R21B R29B R59B R60B R62B R71B R73B R124B R125B R126B R127B R141B R164B R165B SCREW1B SCREW2B SCREW3B SCREW4B SCREW5B SCREW6B SCREW7B SCREW8B SCREW9B SCREW10B SCREW11B SCREW12B SCREW13B T6B T7B T8B
component class U_SiLPA_RF_channel0: B5A B6A B7A B8A B9A B10A B11A B12A B13A B14A B15A B16A B17A C41A C42A C43A C44A C45A C46A C47A C48A C49A C50A C117A C118A C120A C121A D8A D11A D14A D18A IC7A IC22A L12A L13A L15A L16A R18A R19A R21A R29A R59A R60A R62A R71A R73A R124A R125A R126A R127A R141A R164A R165A SCREW1A SCREW2A SCREW3A SCREW4A SCREW5A SCREW6A SCREW7A SCREW8A SCREW9A SCREW10A SCREW11A SCREW12A SCREW13A T6A T7A T8A
component class U_SiLPA_PWR_Supply: C20 C21 C22 C27 C28 C30 C31 C33 C34 C35 C36 C37 C38 C67 C68 C69 C77 C93 C95 C97 C98 C101 C112 C113 C114 D4 D12 FL1 IC5 IC8 IC28 IC30 IC31 IC33 J7 J11 L8 L9 L10 LD10 LD11 LD12 LD13 LD14 LD15 LD16 LD18 R17 R28 R30 R55 R56 R57 R58 R68 R80 R81 R82 R83 R91 R102 R103 R105 R106 R107 R108 R109 R110 R216 R218 RT1 T14 TP1 TP2 TP3 TP4 TP5 TP16 TP18 TP22 TP23 U1
component class SiLPA_HE_EEM_Connectors: C10 C32 C62 C63 C64 C65 C75 C76 C99 C100 C103 C116 D5 IC4 IC6 IC13 IC14 IC15 IC16 IC21 IC26 IC27 IC32 IC43 J9 R6 R16 R26 R34 R35 R36 R37 R38 R39 R40 R41 R42 R43 R44 R45 R46 R47 R48 R49 R50 R51 R61 R72 R92 R117 R118 R119 R120 R121 R122 R123 R145 R146 R147 R148 R149 R150 R151 R168 R235 R236 R241 R242 R243 R247 R248 RN3 RN4 T13 T17
component class U_SiLPA_MCU: C23 C24 C25 C26 C29 C66 C70 C71 C72 C73 C74 C78 C79 C80 C81 C82 C83 C84 C85 C86 C87 C88 C89 C90 C91 C92 C94 C96 C104 C105 D9 D10 D13 D17 FB1 FB4 IC19 IC20 IC23 IC25 IC34 J1 J10 JP1 L19 Q1 R63 R66 R69 R70 R75 R76 R77 R78 R85 R86 R87 R88 R93 R94 R95 R96 R97 R98 R99 R182 R183 W1
net class EEM0: BP_IO.LVDS_N8 BP_IO.LVDS_N9 BP_IO.LVDS_P8 BP_IO.LVDS_P9 LVDS0_N LVDS0_P LVDS1_N LVDS1_P LVDS2_N LVDS2_P LVDS3_N LVDS3_P LVDS4_N LVDS4_P LVDS5_N LVDS5_P LVDS6_N LVDS6_P LVDS7_N LVDS7_P LVDS8_N LVDS8_P LVDS9_N LVDS9_P
differential pair class EEM0: BP_IO.LVDS8 BP_IO.LVDS8A BP_IO.LVDS9 BP_IO.LVDS9A LVDS0 LVDS0A LVDS0B LVDS1 LVDS1A LVDS1B LVDS2 LVDS2A LVDS2B LVDS3 LVDS3A LVDS3B LVDS4 LVDS4A LVDS4B LVDS5 LVDS5A LVDS5B LVDS6 LVDS6A LVDS6B LVDS7 LVDS7A LVDS7B LVDS8 LVDS8A LVDS8B LVDS9 LVDS9A LVDS9B
net class 50_Ohms: NetC2A_2 NetC2B_2 NetC3A_1 NetC3A_2 NetC3B_1 NetC3B_2 NetC11A_1 NetC11A_2 NetC11B_1 NetC11B_2 NetC12A_1 NetC12A_2 NetC12B_1 NetC12B_2 NetC13A_1 NetC13A_2 NetC13B_1 NetC13B_2 NetC14A_1 NetC14A_2 NetC14B_1 NetC14B_2 NetC15A_1 NetC15B_1 NetC16A_2 NetC16B_2 NetC41A_1 NetC41A_2 NetC41B_1 NetC41B_2 NetC44A_1 NetC44A_2 NetC44B_1 NetC44B_2 NetC49A_1 NetC49B_1 NetC50A_1 NetC50B_1 NetC52A_1 NetC52B_1 NetC117A_2 NetC117B_2 NetD11A_2 NetD11B_2 NetJ2A_1 NetJ2B_1
component class SiLPA_HE: C132 FTG1 FTG2 FTG3 FTG4 FTG5 FTG6 J3 J4 J5 J6 LD1 LD2 LD3 LD4 LD5 LD6 LD7 LD8 LD9 M1 M4 R11 R12 R13 R14 R15 R20 R22 R64 R74 R84 R100 R175 R177 R178 S1 S2 S3 S4 SW1 T1 T2 T3 T4 T5 T9 T10 T11 T12 WASHER2 WASHER4 WASHER6 WASHER8
differential pair LVDS9: +LVDS9_P -LVDS9_N
differential pair LVDS8: +LVDS8_P -LVDS8_N
differential pair LVDS7: +LVDS7_P -LVDS7_N
differential pair LVDS6: +LVDS6_P -LVDS6_N
differential pair LVDS5: +LVDS5_P -LVDS5_N
differential pair LVDS4: +LVDS4_P -LVDS4_N
differential pair LVDS3: +LVDS3_P -LVDS3_N
differential pair LVDS2: +LVDS2_P -LVDS2_N
differential pair LVDS1: +LVDS1_P -LVDS1_N
differential pair LVDS0: +LVDS0_P -LVDS0_N
differential pair BP_IO.LVDS9: +BP_IO.LVDS_P9 -BP_IO.LVDS_N9
differential pair BP_IO.LVDS8: +BP_IO.LVDS_P8 -BP_IO.LVDS_N8
differential pair USB_D_R: +USB_D_R_P -USB_D_R_N
differential pair BP_IO.LVDS7: +BP_IO.LVDS_P7 -BP_IO.LVDS_N7
differential pair BP_IO.LVDS6: +BP_IO.LVDS_P6 -BP_IO.LVDS_N6
differential pair BP_IO.LVDS5: +BP_IO.LVDS_P5 -BP_IO.LVDS_N5
differential pair BP_IO.LVDS4: +BP_IO.LVDS_P4 -BP_IO.LVDS_N4
differential pair BP_IO.LVDS3: +BP_IO.LVDS_P3 -BP_IO.LVDS_N3
differential pair BP_IO.LVDS2: +BP_IO.LVDS_P2 -BP_IO.LVDS_N2
differential pair BP_IO.LVDS1: +BP_IO.LVDS_P1 -BP_IO.LVDS_N1
differential pair BP_IO.LVDS0: +BP_IO.LVDS_P0 -BP_IO.LVDS_N0
differential pair USB: +USB_P -USB_N

## Components (designator, comment, footprint, x,y, rotation, side; value= is the part's Value field where it differs from the comment)
B5A "Plated Hole" MTG240_400#1 -0.603,67.693 r0 top (schematic designator B5)
B5B "Plated Hole" MTG240_400#1 -0.603,30.693 r0 top (schematic designator B5)
B6A "Plated Hole" MTG240_400#2 51.427,71.393 r0 top (schematic designator B6)
B6B "Plated Hole" MTG240_400#1 51.427,34.393 r0 top (schematic designator B6)
B7A "Plated Hole" MTG240_400#3 -0.563,51.193 r0 top (schematic designator B7)
B7B "Plated Hole" MTG240_400#3 -0.563,14.193 r0 top (schematic designator B7)
B8A "Plated Hole" MTG240_400#2 29.927,71.376 r0 top (schematic designator B8)
B8B "Plated Hole" MTG240_400#1 29.927,34.393 r0 top (schematic designator B8)
B9A "Plated Hole" MTG240_400#1 70.427,75.443 r0 top (schematic designator B9)
B9B "Plated Hole" MTG240_400#1 70.427,38.443 r0 top (schematic designator B9)
B10A "Plated Hole" MTG240_400#1 8.177,83.443 r0 top (schematic designator B10)
B10B "Plated Hole" MTG240_400#1 8.177,46.443 r0 top (schematic designator B10)
B11A "Plated Hole" MTG240_400#2 28.927,54.943 r0 top locked (schematic designator B11)
B11B "Plated Hole" MTG240_400#2 28.927,17.943 r0 top (schematic designator B11)
B12A "Plated Hole" MTG240_400#1 70.427,52.443 r0 top (schematic designator B12)
B12B "Plated Hole" MTG240_400#1 70.427,15.443 r0 top (schematic designator B12)
B13A "Plated Hole" MTG240_400#1 108.677,83.443 r0 top (schematic designator B13)
B13B "Plated Hole" MTG240_400#2 108.677,46.443 r0 top (schematic designator B13)
B14A "Plated Hole" MTG240_400#2 108.677,51.443 r0 top (schematic designator B14)
B14B "Plated Hole" MTG240_400#1 108.677,14.443 r0 top (schematic designator B14)
B15A "Plated Hole" MTG240_400#1 44.177,83.443 r0 top (schematic designator B15)
B15B "Plated Hole" MTG240_400#1 44.177,46.443 r0 top (schematic designator B15)
B16A "Plated Hole" MTG240_400#1 82.427,83.443 r0 top (schematic designator B16)
B16B "Plated Hole" MTG240_400#1 82.427,46.443 r0 top (schematic designator B16)
B17A "Plated Hole" MTG240_400#2 96.877,71.193 r0 top (schematic designator B17)
B17B "Plated Hole" MTG240_400#1 96.877,34.193 r0 top (schematic designator B17)
C1A "10nF" CAPC1005X55N 87.317,64.783 r90 top (schematic designator C1)
C1B "10nF" CAPC1005X55N 87.317,27.783 r90 top (schematic designator C1)
C2A "Undefined" CAPC1608X90N 59.487,61.563 r180 top (schematic designator C2)
C2B "Undefined" CAPC1608X90N 59.652,24.411 r180 top (schematic designator C2)
C3A "2.2nF" CAPC1608X87N 52.117,62.243 r270 top (schematic designator C3)
C3B "2.2nF" CAPC1608X87N 52.117,25.243 r270 top (schematic designator C3)
C4A "4.7uF" CAPC1709X95N 69.227,65.243 r270 top (schematic designator C4)
C4B "4.7uF" CAPC1709X95N 69.127,28.243 r270 top (schematic designator C4)
C5A "100nF" CAPC1608X87N 71.027,65.243 r270 top (schematic designator C5)
C5B "100nF" CAPC1608X87N 71.142,28.217 r270 top (schematic designator C5)
C6A "680pF" CAPC1608X87N 67.427,65.243 r270 top (schematic designator C6)
C6B "680pF" CAPC1608X87N 67.127,28.243 r270 top (schematic designator C6)
C7A "680pF" CAPC1608X87N 49.227,65.343 r270 top (schematic designator C7)
C7B "680pF" CAPC1608X87N 48.737,28.233 r270 top (schematic designator C7)
C8A "100nF" CAPC1608X87N 47.427,65.343 r270 top (schematic designator C8)
C8B "100nF" CAPC1608X87N 46.927,28.243 r270 top (schematic designator C8)
C9A "4.7uF" CAPC1709X95N 45.627,65.343 r270 top (schematic designator C9)
C9B "4.7uF" CAPC1709X95N 45.1,28.368 r270 top (schematic designator C9)
C10 "100nF" CAPC1005X55N 155.231,48.058 r0 top
C11A "680pF" CAPC1608X87N 94.857,62.473 r180 top (schematic designator C11)
C11B "680pF" CAPC1608X87N 94.857,25.473 r180 top (schematic designator C11)
C12A "680pF" CAPC1608X87N 86.127,61.193 r180 top (schematic designator C12)
C12B "680pF" CAPC1608X87N 86.127,24.193 r180 top (schematic designator C12)
C13A "680pF" CAPC1608X87N 77.127,62.543 r180 top (schematic designator C13)
C13B "680pF" CAPC1608X87N 77.127,25.543 r180 top (schematic designator C13)
C14A "680pF" CAPC1608X87N 67.677,59.422 r180 top (schematic designator C14)
C14B "680pF" CAPC1608X87N 67.677,22.422 r180 top (schematic designator C14)
C15A "680pF" CAPC1608X87N 59.747,59.513 r180 top (schematic designator C15)
C15B "680pF" CAPC1608X87N 59.747,22.513 r180 top (schematic designator C15)
C16A "680pF" CAPC1608X87N 44.407,61.214 r180 top (schematic designator C16)
C16B "680pF" CAPC1608X87N 44.407,24.214 r180 top (schematic designator C16)
C17A "100pF" CAPC1005X55N 94.063,60.156 r0 top (schematic designator C17)
C17B "100pF" CAPC1005X55N 93.957,23.373 r0 top (schematic designator C17)
C18A "10uF" CAPC2012X95N 91.374,58.223 r0 top (schematic designator C18)
C18B "10uF" CAPC2012X95N 91.327,21.35 r0 top (schematic designator C18)
C19A "100nF" CAPC1005X55N 94.073,59.196 r180 top (schematic designator C19)
C19B "100nF" CAPC1005X55N 93.967,22.413 r180 top (schematic designator C19)
C20 "10uF" CAPC2012X95N 195.027,83.223 r270 top
C21 "10uF" CAPC2012X95N 168.927,82.743 r270 top
C22 "10uF" CAPC2012X95N 166.927,82.693 r270 top
C23 "1uF" CAPC1005X55N 138.027,56.143 r0 top
C24 "10nF" CAPC1005X55N 141.991,51.732 r90 top
C25 "1uF" CAPC1005X55N 140.311,50.766 r90 top
C26 "1uF" CAPC1005X55N 144.225,51.43 r90 top
C27 "10uF" CAPMP3216X180N 146.9,74.333 r90 top
C28 "22uF" CAPC3216X180N 149.335,75.908 r270 top
C29 "100nF" CAPC1005X55N 145.937,51.522 r180 top
C30 "22uF" CAPC3216X180N 133.976,66.922 r180 top
C31 "10uF" CAPMP3216X180N 143.55,63.521 r0 top
C32 "100nF" CAPC1005X55N 155.352,45.164 r0 top
C33 "22uF" CAPC3216X180N 162.727,75.543 r180 top
C34 "100nF" CAPC1005X55N 165.927,75.76 r270 top
C35 "22uF" CAPC3216X180N 158.976,78.27 r270 top
C36 "100nF" CAPC1005X55N 166.227,68.943 r0 top
C37 "22uF" CAPC3216X180N 148.062,83.799 r0 top
C38 "22uF" CAPC3216X180N 170.116,72.83 r270 top
C39 "10uF" CAPC3225X280N 125.545,60.193 r270 top
C40 "10uF" CAPC3225X280N 116.625,58.521 r270 top
C41A "470pF" CAPC1608X87N 24.327,62.443 r90 top (schematic designator C41)
C41B "470pF" CAPC1608X87N 24.135,25.237 r90 top (schematic designator C41)
C42A "4.7uF" CAPC1709X95N 40.441,62.341 r90 top (schematic designator C42)
C42B "4.7uF" CAPC1709X95N 39.801,24.943 r90 top (schematic designator C42)
C43A "100nF" CAPC1005X55N 37.816,61.357 r90 top (schematic designator C43)
C43B "100nF" CAPC1005X55N 37.427,24.193 r90 top (schematic designator C43)
C44A "2.2nF" CAPC1608X87N 5.97,62.833 r270 top (schematic designator C44)
C44B "2.2nF" CAPC1608X87N 5.842,25.857 r270 top (schematic designator C44)
C45A "680pF" CAPC1005X55N 36.611,61.377 r90 top (schematic designator C45)
C45B "680pF" CAPC1005X55N 36.405,24.196 r90 top (schematic designator C45)
C46A "680pF" CAPC1608X87N 20.6,66.325 r0 top (schematic designator C46)
C46B "680pF" CAPC1608X87N 20.566,29.269 r0 top (schematic designator C46)
C47A "100nF" CAPC1005X55N 24.9,66.2 r180 top (schematic designator C47)
C47B "100nF" CAPC1005X55N 25.251,29.136 r180 top (schematic designator C47)
C48A "470nF" CAPC2012X110N 21.175,68.025 r0 top (schematic designator C48)
C48B "470nF" CAPC2012X110N 20.8,31.2 r0 top (schematic designator C48)
C49A "3.3nF" CAPC1608X87N 35.089,65.047 r0 top (schematic designator C49)
C49B "3.3nF" CAPC1608X87N 35.005,27.96 r0 top (schematic designator C49)
C50A "270pF" CAPC1608X87N 12.233,63.57 r180 top (schematic designator C50)
C50B "270pF" CAPC1608X87N 11.909,26.71 r180 top (schematic designator C50)
C51A "100pF" CAPC1005X55N 39.587,69.923 r90 top (schematic designator C51)
C51B "100pF" CAPC1005X55N 39.587,32.923 r90 top (schematic designator C51)
C52A "2.2nF" CAPC1608X87N 12.044,66.825 r0 top (schematic designator C52)
C52B "2.2nF" CAPC1608X87N 11.95,29.7 r0 top (schematic designator C52)
C53A "10nF" CAPC1005X55N 19.887,72.064 r180 top (schematic designator C53)
C53B "10nF" CAPC1005X55N 19.445,35.236 r270 top (schematic designator C53)
C54A "1uF" CAPC1608X87N 17.775,68.35 r90 top (schematic designator C54)
C54B "1uF" CAPC1608X87N 17.468,31.471 r90 top (schematic designator C54)
C55A "100nF" CAPC1005X55N 19.375,70.625 r270 top (schematic designator C55)
C55B "100nF" CAPC1005X55N 19.356,33.348 r270 top (schematic designator C55)
C56A "100nF" CAPC1005X55N 54.695,68.343 r270 top (schematic designator C56)
C56B "100nF" CAPC1005X55N 54.695,31.343 r270 top (schematic designator C56)
C57A "100nF" CAPC1005X55N 36.155,68.543 r180 top (schematic designator C57)
C57B "100nF" CAPC1005X55N 36.155,31.543 r180 top (schematic designator C57)
C58A "100nF" CAPC1005X55N 78.067,71.143 r270 top (schematic designator C58)
C58B "100nF" CAPC1005X55N 78.067,34.466 r270 top (schematic designator C58)
C59A "100pF" CAPC1005X55N 16.184,68.874 r0 top (schematic designator C59)
C59B "100pF" CAPC1005X55N 15.875,31.545 r0 top (schematic designator C59)
C60A "100nF" CAPC1005X55N 16.271,71.119 r90 top (schematic designator C60)
C60B "100nF" CAPC1005X55N 16.238,33.883 r90 top (schematic designator C60)
C61A "100nF" CAPC1005X55N 44.927,71.943 r90 top (schematic designator C61)
C61B "100nF" CAPC1005X55N 44.927,34.943 r90 top (schematic designator C61)
C62 "100nF" CAPC1005X55N 155.414,33.214 r0 top
C63 "100nF" CAPC1005X55N 155.425,35.395 r0 top
C64 "100nF" CAPC1005X55N 155.368,23.802 r0 top
C65 "100nF" CAPC1005X55N 179.537,16.043 r180 top
C66 "100nF" CAPC1005X55N 156.685,7.151 r90 top
C67 "100nF" CAPC1005X55N 192.852,70.393 r270 top
C68 "1uF" CAPC1608X87N 177.927,74.693 r180 top
C69 "1uF" CAPC1608X87N 178.127,56.593 r90 top
C70 "1uF" CAPC1608X87N 121.144,44.866 r270 top
C71 "10nF" CAPC1005X55N 133.177,16.524 r90 top
C72 "12pF" CAPC1005X55N 130.55,21.125 r90 top
C73 "12pF" CAPC1005X55N 130.527,16.469 r270 top
C74 "100nF" CAPC1005X55N 16.747,3.021 r90 top
C75 "1uF" CAPC1005X55N 22.75,35.35 r90 top
C76 "1uF" CAPC1005X55N 22.739,72.067 r90 top
C77 "4.7uF" CAPMP3216X180N 189.004,14.981 r90 top
C78 "1uF" CAPC1608X87N 133.46,22.464 r270 top
C79 "100nF" CAPC1005X55N 136.727,24.043 r90 top
C80 "100nF" CAPC1005X55N 142.263,11.543 r180 top
C81 "100nF" CAPC1005X55N 145.552,20.497 r270 top
C82 "1uF" CAPC1608X87N 144.638,12.796 r180 top
C83 "1uF" CAPC1005X55N 133.387,42.618 r0 top
C84 "10nF" CAPC1005X55N 136.717,38.801 r90 top
C85 "1uF" CAPC1005X55N 135.717,38.793 r90 top
C86 "1uF" CAPC1005X55N 139.677,38.638 r0 top
C87 "1uF" CAPC1608X87N 138.855,35.395 r180 top
C88 "10nF" CAPC1005X55N 135.314,34.506 r270 top
C89 "22uF" CAPC1608X90N 138.822,37.11 r180 top
C90 "100nF" CAPC1005X55N 138.055,38.862 r90 top
C91 "1uF" CAPC1608X87N 142.466,38.939 r90 top
C92 "100nF" CAPC1005X55N 141.299,39.291 r90 top
C93 "10nF" CAPC1005X55N 192.25,59.425 r180 top
C94 "4.7uF" CAPC1709X95N 133.375,12.268 r90 top
C95 "100nF" CAPC1005X55N 168.527,71.743 r270 top
C96 "10nF" CAPC1005X55N 135.314,36.517 r90 top
C97 "1uF" CAPC1608X87N 126.914,64.853 r0 top
C98 "1uF" CAPC1608X87N 121.958,73.472 r270 top
C99 "1uF" CAPC1005X55N 165.927,86.943 r270 top
C100 "100nF" CAPC1005X55N 182.827,11.043 r0 top
C101 "1uF" CAPC1608X87N 190.477,6.793 r0 top
C102 "10uF" CAPC3225X280N 113.96,40.292 r270 top
C103 "100nF" CAPC1005X55N 166.802,4.693 r180 bottom
C104 "1uF" CAPC1608X87N 145.498,49.057 r90 top
C105 "100nF" CAPC1005X55N 142.527,49.943 r0 top
C106 "10nF" CAPC1005X55N 112.156,70.256 r90 top
C107 "10nF" CAPC1005X55N 119.824,22.154 r0 top
C112 "1uF" CAPC1608X87N 186.527,64.068 r0 top
C113 "1uF" CAPC1608X87N 189.327,70.068 r180 top
C114 "22uF" CAPC3216X180N 184.027,73.618 r270 top
C116 "100nF" CAPC1005X55N 157.122,14.957 r0 top
C117A "2.7pF" CAPC1608X87N 17.406,64.323 r270 top (schematic designator C117)
C117B "2.7pF" CAPC1608X87N 17.127,27.443 r270 top (schematic designator C117)
C118A "0.9pF" CAPC1608X87N 9.927,62.743 r90 top (schematic designator C118)
C118B "0.9pF" CAPC1608X87N 9.705,25.966 r90 top (schematic designator C118)
C120A "100nF" CAPC1005X55N 43.594,58.836 r90 top (schematic designator C120)
C120B "100nF" CAPC1005X55N 43.512,21.749 r90 top (schematic designator C120)
C121A "100nF" CAPC1005X55N 34.68,55.83 r270 top (schematic designator C121)
C121B "100nF" CAPC1005X55N 34.374,18.813 r270 top (schematic designator C121)
C122 "100nF" CAPC1005X55N 129.427,-0.157 r180 top
C123 "22uF" CAPC3216X180N 132.053,7.986 r270 top
C124 "2.2uF" CAPC1608X87N 129.961,7.313 r270 top
C125 "22uF" CAPC2012X135N 114.427,5.193 r90 top
C126 "22uF" CAPC2012X135N 108.311,8.693 r270 top
C127 "22uF" CAPC2012X135N 100.079,9.593 r270 top
C128 "22uF" CAPC2012X135N 98.051,9.584 r270 top
C129 "10uF" CAPMP3216X180N 112.177,4.443 r90 top
C130 "2.2uF" CAPC1608X87N 125.207,4.943 r0 top
C131 "1.5nF" CAPC1005X55N 125.661,7.511 r0 top
C132 "22pF" CAPC1005X55N 5.817,0.45 r0 bottom
C134 "1.5nF" CAPC1005X55N 125.661,6.443 r0 top
C135 "22uF" CAPC2012X135N 121.686,4.805 r0 top
C136 "22uF" CAPC2012X135N 121.786,2.155 r0 top
C137 "22uF" CAPC3216X180N 121.045,27.128 r270 top
C138 "22uF" CAPC3216X180N 123.688,27.158 r270 top
C139 "22uF" CAPC3216X180N 129.822,28.675 r180 top
C140 "22uF" CAPC3216X180N 129.875,26.29 r180 top
C141 "22uF" CAPC3216X180N 119.927,12.693 r90 top
C142 "1uF" CAPC1608X87N 122.401,13.582 r270 top
C143 "100nF" CAPC1005X55N 118.277,16.779 r90 top
C144 "Undefined" CAPC1005X55N 123.767,14.932 r90 top
C145 "220pF" CAPC1005X55N 125.116,12.882 r90 top
C146 "1uF" CAPC1608X87N 125.687,51.766 r90 top
C147 "10uF" CAPC3225X280N 122.804,40.312 r270 top
C149 "1uF" CAPC1608X87N 122.677,33.164 r90 top
C154 "22uF" CAPC1608X90N 191.491,38.118 r90 top
C155 "100nF" CAPC1005X55N 191.162,44.368 r90 top
C165 "100nF" CAPC1005X55N 191.162,42.436 r270 top
C166 "1uF" CAPC1005X55N 204.246,40.921 r180 top
C167 "100nF" CAPC1005X55N 191.177,30.293 r180 top
C245A "100nF" CAPC1005X55N 75.71,72.818 r180 top (schematic designator C245)
C245B "100nF" CAPC1005X55N 75.71,35.818 r180 top (schematic designator C245)
D1 "CDBU0520-HF" CDBU 201.603,39.15 r180 top
D1A "SZNUP1301ML3T1G" SOT95P240X110-3N 6.539,76.886 r90 top (schematic designator D1)
D1B "SZNUP1301ML3T1G" SOT95P240X110-3N 6.427,40.28 r90 top (schematic designator D1)
D2A "AQ4021-01FTG-C" SOD2513X114N 71.277,59.723 r90 top (schematic designator D2)
D2B "AQ4021-01FTG-C" SOD2513X114N 71.277,22.723 r90 top (schematic designator D2)
D3A "AQ4021-01FTG-C" SOD2513X114N 50.317,62.503 r270 top (schematic designator D3)
D3B "AQ4021-01FTG-C" SOD2513X114N 50.317,25.503 r270 top (schematic designator D3)
D4 "SMBJ12A" DIOM5336X265N 172.427,82.959 r90 top
D5 "PESD3V3L5UY" SOT65P210X110-6N 177.18,13.293 r180 bottom
D7 "CDBU0520-HF" CDBU 201.603,40.913 r180 top
D8A "AQ4020-01FTG" SOD2512X110N 31.253,66.836 r0 top (schematic designator D8)
D8B "AQ4020-01FTG" SOD2512X110N 32.948,30.202 r0 top (schematic designator D8)
D9 "PRTR5V0U2X" SOT190P230X110-4N 171.462,-0.018 r270 top
D10 "BAT165" SOD2512X110N 161.609,2.432 r270 top
D11A "SZNUP1301ML3T1G" SOT95P240X110-3N 21.327,61.843 r90 top (schematic designator D11)
D11B "SZNUP1301ML3T1G" SOT95P240X110-3N 21.264,24.707 r90 top (schematic designator D11)
D12 "BAT165" SOD2512X110N 170.141,6.068 r270 top
D13 "PRTR5V0U2X" SOT190P230X110-4N 15.7,5.875 r270 top
D14A "BZV55-B33" DIOMELF3515N 17.127,60.043 r180 top (schematic designator D14)
D14B "BZV55-B33" DIOMELF3515N 16.75,23.8 r180 top (schematic designator D14)
D15 "PESD3V3L5UY" SOT65P210X110-6N 180.427,2.443 r0 top
D16 "PESD3V3L5UY" SOT65P210X110-6N 194.636,28.862 r180 top
D17 "BAT165" SOD2512X110N 159.922,6.287 r0 top
D18A "BZV55-B33" DIOMELF3515N 12.184,60.043 r180 top (schematic designator D18)
D18B "BZV55-B33" DIOMELF3515N 11.584,23.186 r180 top (schematic designator D18)
D19 "PMEG6020ER" SODFL3517X110N 95.462,10.301 r270 top
FB1 "220R@100MHz" INDC1005X55N 132.662,14.518 r0 top
FB2A "220R@100MHz" INDC1005X55N 20.792,70.319 r180 top (schematic designator FB2)
FB2B "220R@100MHz" INDC1005X55N 20.682,32.636 r180 top (schematic designator FB2)
FB4 "220R@100MHz" INDC1005X55N 15.096,3.46 r180 top
FL1 "10A/50VDC" FIL_MURATA_BNX02 184.227,82.459 r180 top
FTG1 "Use only in PCB" FIDUCIAL_TOP_C100-200 204.752,89.943 r90 top
FTG2 "Use only in PCB" FIDUCIAL_TOP_S100-200 204.702,89.943 r90 bottom
FTG3 "Use only in PCB" FIDUCIAL_TOP_S100-200 12.577,0.243 r90 top
FTG4 "Use only in PCB" FIDUCIAL_TOP_S100-200 12.577,0.243 r90 bottom
FTG5 "Use only in PCB" FIDUCIAL_TOP_S100-200 10.696,88.733 r90 bottom
FTG6 "Use only in PCB" FIDUCIAL_TOP_S100-200 18.357,88.72 r90 top
IC1A "HMC349ALP4CE" QFN65P400X400X100-17N-S255 90.389,62.089 r180 top (schematic designator IC1)
IC1B "HMC349ALP4CE" QFN65P400X400X100-17N-S255 90.389,25.089 r180 top (schematic designator IC1)
IC2A "ADL5536ARKZ" ANALOG-DEVICES_SOT-89(RK-3) 74.76,58.947 r270 top (schematic designator IC2)
IC2B "ADL5536ARKZ" ANALOG-DEVICES_SOT-89(RK-3) 74.76,21.947 r270 top (schematic designator IC2)
IC3A "PHA-1+" MINI-CIRCUITS_DF782 55.402,59.343 r180 top (schematic designator IC3)
IC3B "PHA-1+" MINI-CIRCUITS_DF782 55.402,22.343 r180 top (schematic designator IC3)
IC4 "FIN1027AMX" SOIC127P600X175-8N 160.206,43.243 r0 top
IC5 "TPS62148RGX" TEXAS_RGX0011A 166.156,71.833 r180 top
IC6 "FIN1028MX" SOIC127P600X175-8N 160.105,49.963 r180 top
IC7A "NPTB00004A" SOIC127P610X167-9N-R245X335 28.777,63.209 r180 top (schematic designator IC7)
IC7B "NPTB00004A" SOIC127P610X167-9N-R245X335 28.7,26.122 r180 top (schematic designator IC7)
IC8 "MIC29302AWD" TO127P991X239-6N-R585X701 140.993,71.533 r90 top
IC9A "ADL5904ACPZN-R7" QFN50P300X300X80-17N-S175 13.552,70.369 r90 top (schematic designator IC9)
IC9B "ADL5904ACPZN-R7" QFN50P300X300X80-17N-S175 13.442,33.123 r90 top (schematic designator IC9)
IC10A "ADCMP600BRJZ-R2" SOT95P280X145-5N 42.217,70.923 r0 top (schematic designator IC10)
IC10B "ADCMP600BRJZ-R2" SOT95P280X145-5N 42.217,33.923 r0 top (schematic designator IC10)
IC11A "SN74LVC112APWR" SOP65P640X120-16N 59.427,69.943 r180 top (schematic designator IC11)
IC11B "SN74LVC112APWR" SOP65P640X120-16N 59.427,32.943 r180 top (schematic designator IC11)
IC12A "MCP6291T-E/OT" SOT95P270X145-5N 36.363,70.912 r180 top (schematic designator IC12)
IC12B "MCP6291T-E/OT" SOT95P270X145-5N 36.363,33.912 r180 top (schematic designator IC12)
IC13 "FIN1028MX" SOIC127P600X175-8N 160.205,37.3 r180 top
IC14 "FIN1027AMX" SOIC127P600X175-8N 160.177,31.292 r0 top
IC15 "FIN1028MX" SOIC127P600X175-8N 160.151,25.707 r180 top
IC16 "24AA02E48T-I/OT" SOT95P280X145-5N 177.437,13.337 r0 top
IC17A "SN74LVC1G08DBVR" DBV0005A_L 80.892,71.702 r180 top (schematic designator IC17)
IC17B "SN74LVC1G08DBVR" DBV0005A_L 80.892,34.702 r180 top (schematic designator IC17)
IC18 "INA286AQDRQ1" SOIC127P600X175-8N 116.552,69.154 r180 top
IC19 "ADR391AUJZ" SOT95P280X100-5N 117.726,45.075 r90 top
IC20 "STM32F072CBT6" STM-LQFP48_M 139.513,17.718 r0 top
IC21 "FIN1028MX" SOIC127P600X175-8N 160.177,18.288 r180 top
IC22A "AD8397ARDZ" SOIC127P600X175-9N-R241X309 39.057,57.33 r0 top (schematic designator IC22)
IC22B "AD8397ARDZ" SOIC127P600X175-9N-R241X309 38.98,20.243 r0 top (schematic designator IC22)
IC23 "STM809SWX6F" SOT-23 160.074,4.481 r180 top
IC24A "SN74LVC1G32DBVR" SOT95P280X145-5N 74.96,70.288 r0 top (schematic designator IC24)
IC24B "SN74LVC1G32DBVR" SOT95P280X145-5N 74.96,33.288 r0 top (schematic designator IC24)
IC25 "MAX1329BETL+" QFN50P600X600X80-41N-S425 138.167,43.493 r180 top
IC26 "LM75AIMM/NOPB" SOP65P490X109-8N 25.1,32.725 r90 top
IC27 "LM75AIMM/NOPB" SOP65P490X109-8N 24.975,69.927 r90 top
IC28 "TPS7A7001DDA" SOIC127P600X170-9N-R240X310 133.701,72.829 r270 top
IC29 "INA286AQDRQ1" SOIC127P600X175-8N 114.962,22.043 r0 top
IC30 "LD1117DT33CTR" TO228P972X240-3N-R540X510 178.427,68.193 r270 top
IC31 "LD1117DT33CTR" TO228P972X240-3N-R540X510 126.414,71.336 r90 top
IC32 "74HC4066PW" SOP65P640X110-14N 180.427,7.643 r0 top
IC33 "MIC5219-3.3YM5" SOT95P280X145-5N 189.527,9.693 r90 top
IC34 "MAX1329BETL+" QFN50P600X600X80-41N-S425 143.261,56.424 r180 top
IC36 "LT3015EDD#PBF" SON50P300X300X80-9N-R175X248 104.826,7.943 r180 top
IC37 "MAX17577ATC+" SON50P300X300X80-13N-R180X260 128.711,2.829 r270 top
IC38 "74HC4066PW" SOP65P640X110-14N 195.136,33.368 r180 top
IC39 "TLC555ID" SOIC127P600X175-8N 195.591,42.886 r180 top
IC40 "LT8337EV-1" "ANALOG-DEVICES_LQFN(16) # 05-08-1798" 121.001,17.479 r180 top
IC41 "TPS7A4701RGWT" QFN65P500X500X100-21N-S325 121.33,51.96 r0 top
IC42 "TPS7A4701RGWT" QFN65P500X500X100-21N-S325 117.93,33.335 r0 top
IC43 "24AA025E48-I/SN" SOIC127P600X175-8N 161.792,6.638 r0 bottom
J1 "216989-0001" FP-2169890001-MFG -1.748,7.368 r270 top locked
J2A "U.FL" HIROSE_U.FL-R-SMT-1(10) 83.707,65.663 r0 top (schematic designator J2)
J2B "U.FL" HIROSE_U.FL-R-SMT-1(10) 83.707,28.663 r0 top (schematic designator J2)
J3 "SMA" DELOCK_65848 0.561,77.693 r180 top locked
J4 "SMA" DELOCK_65848 0.561,61.193 r180 top locked
J5 "SMA" DELOCK_65848 0.561,40.693 r180 top locked
J6 "SMA" DELOCK_65848 0.561,23.943 r180 top locked
J7 "" MOLEX_39-30-0040 199.922,59.655 r270 top
J9 "" 3M_N2530-6002RB 170.411,32.161 r270 top locked